# Altium PCB TP4056_2022-02-24.pcbdoc
Units mm, origin at the board's own origin, x right, y up, seen from the top; angles counter-clockwise.
Board outline 58.67 x 48.26 mm, 2 copper layers (Top Layer, Bottom Layer); 20 components, 22 nets, 58 pads, 10 vias.
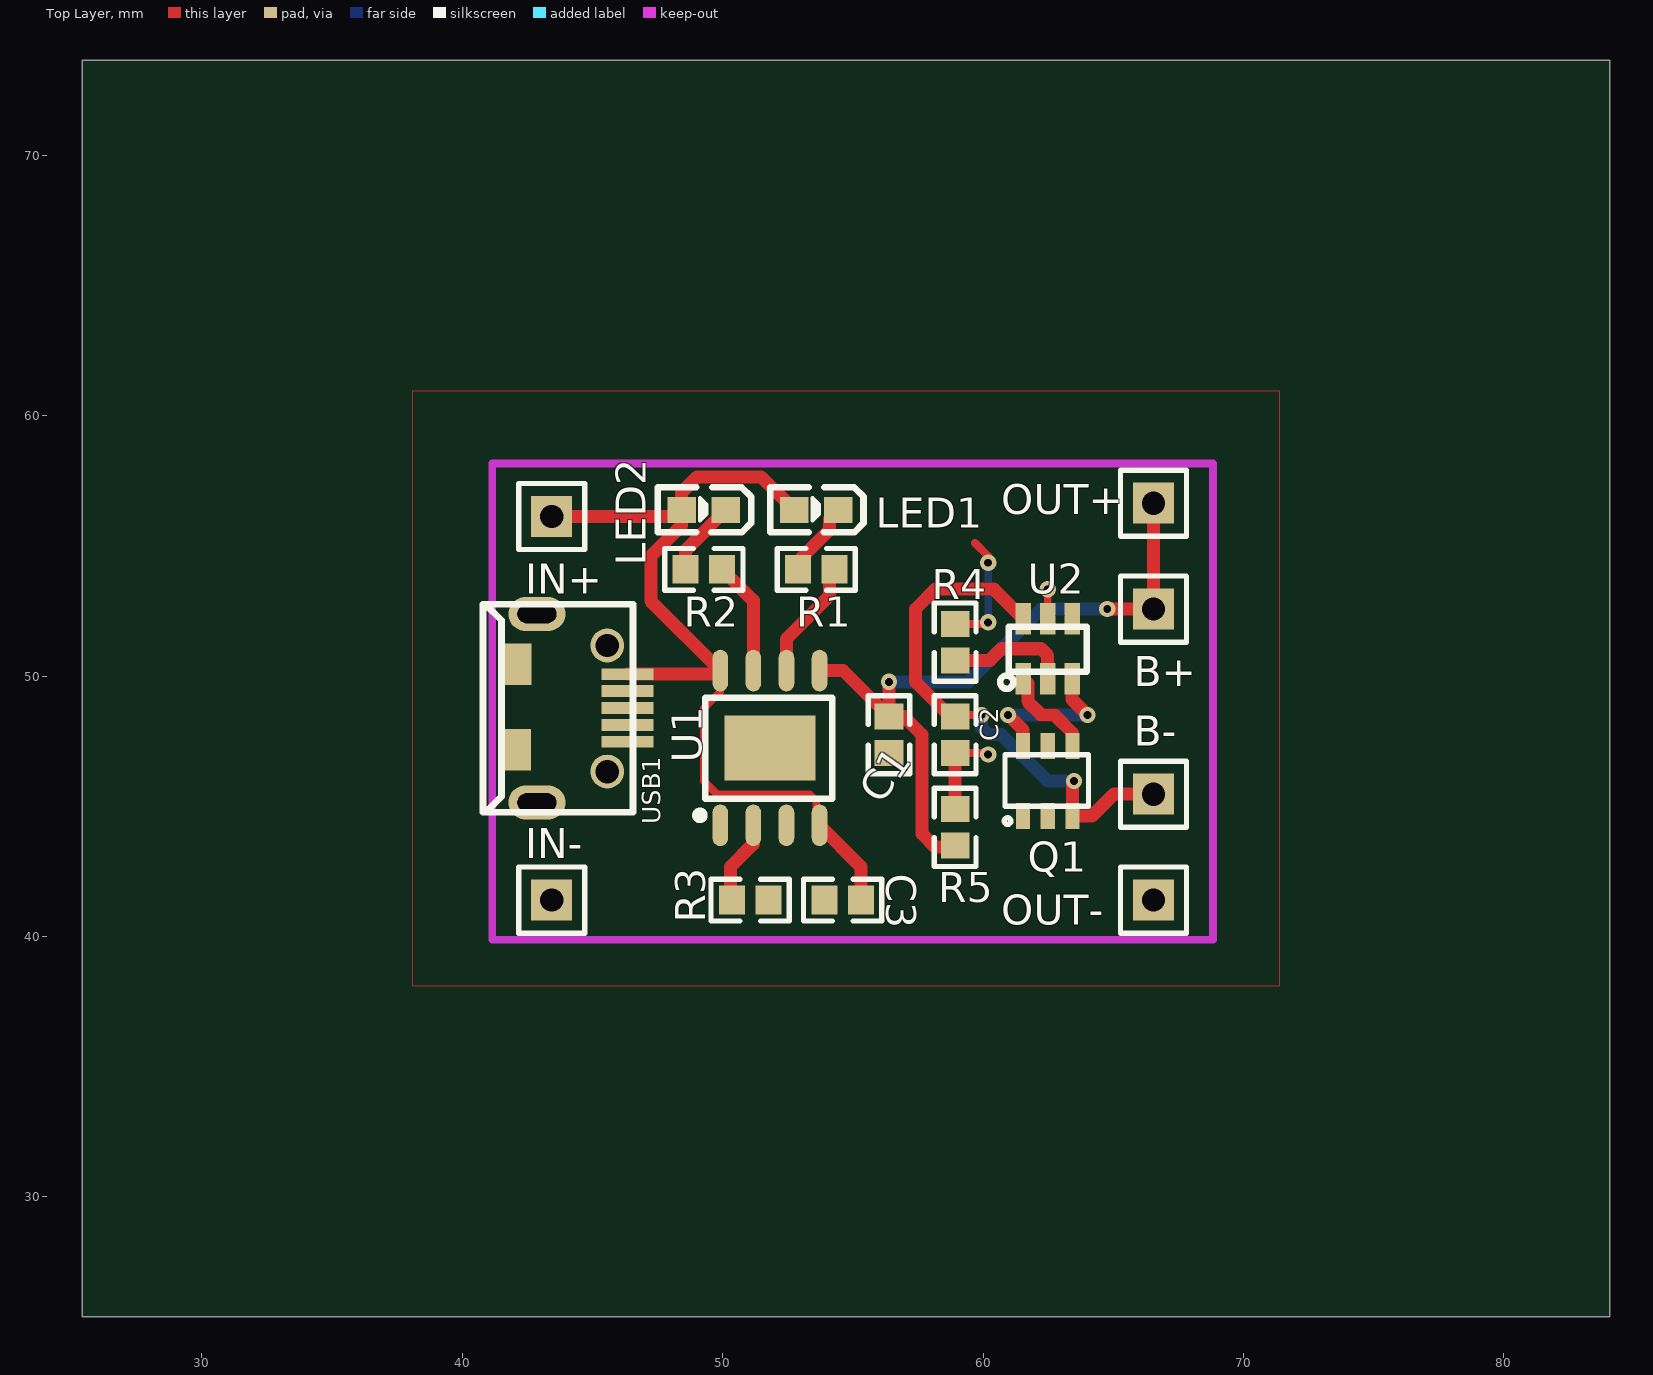
[diagram p0: Top Layer view]
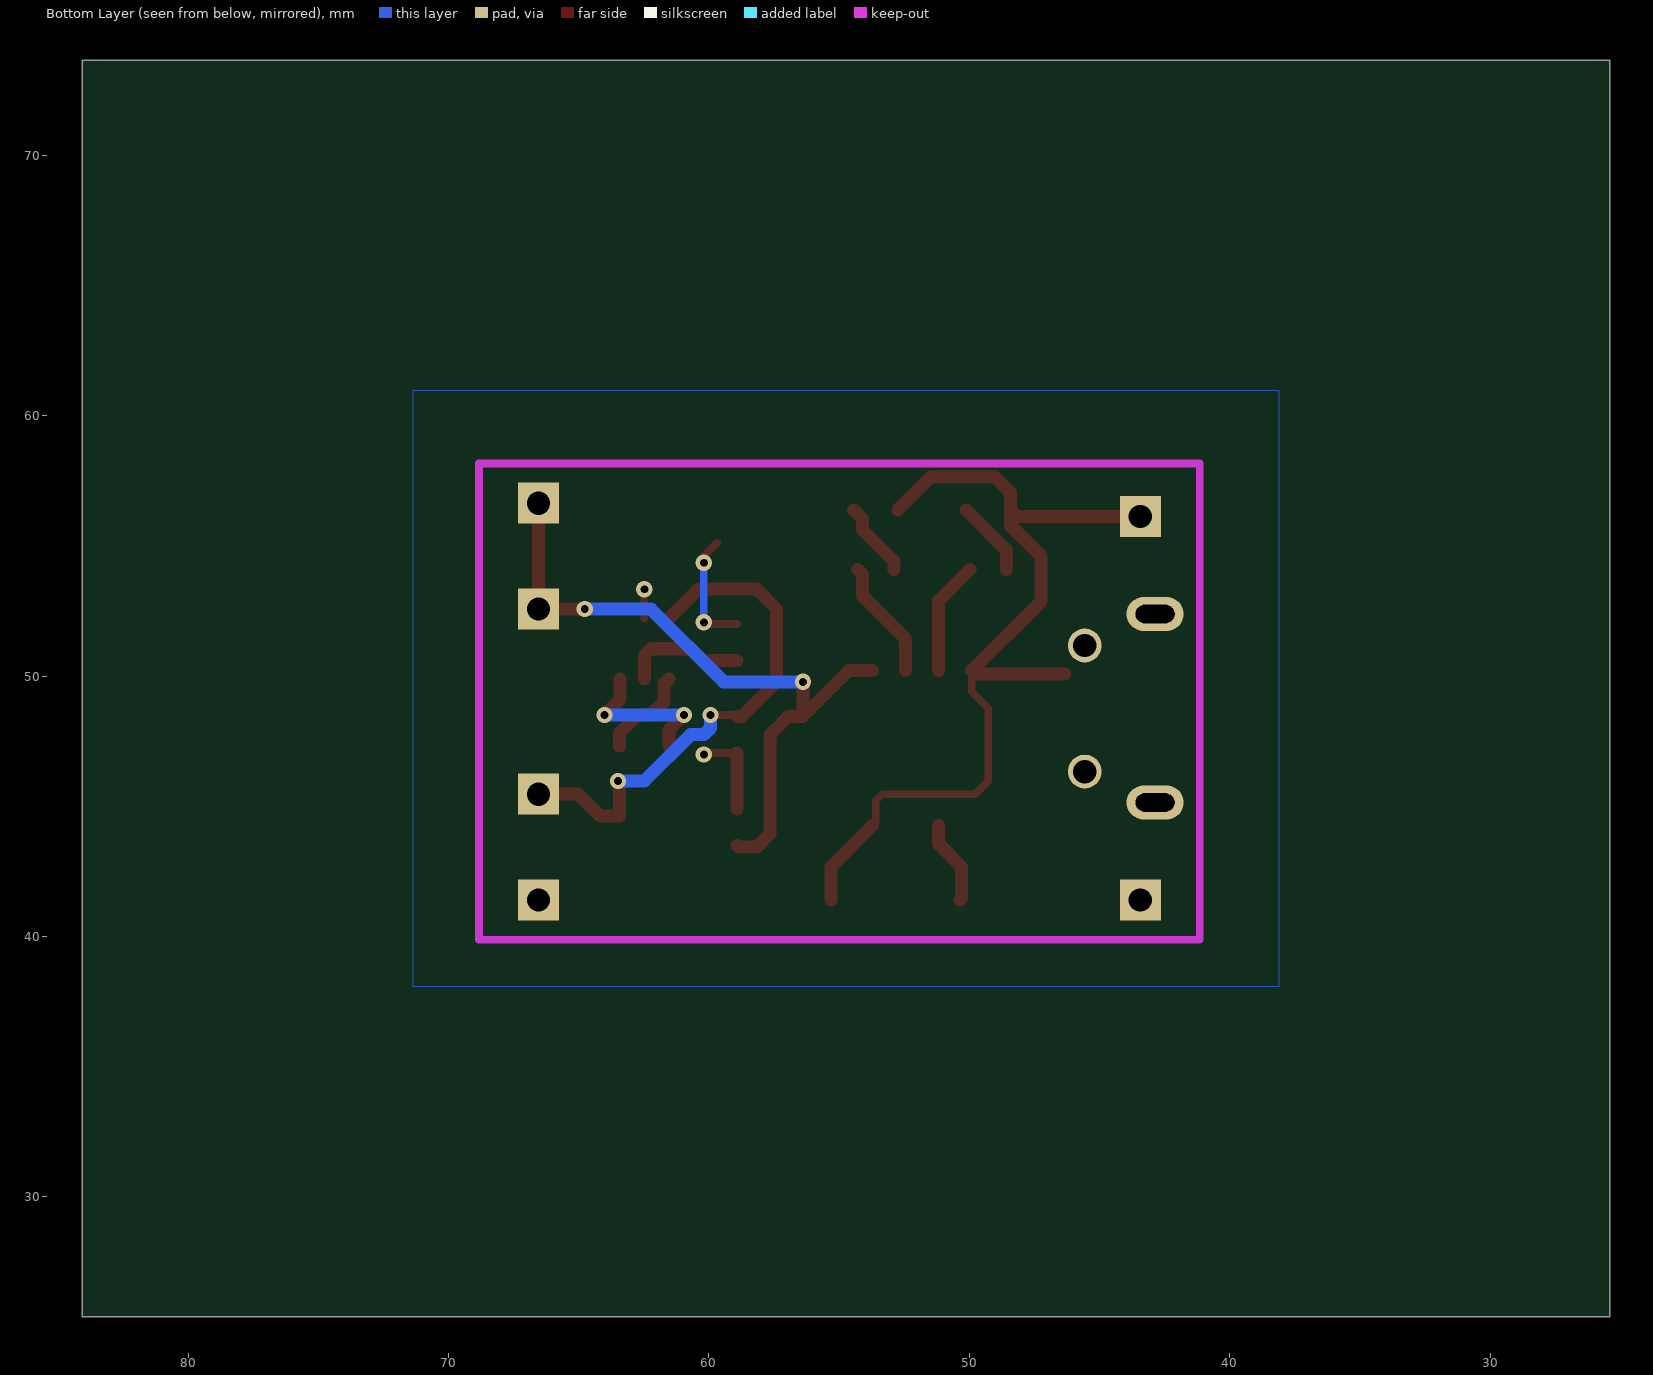
[diagram p1: Bottom Layer view, seen from below]

## Layer stack, top to bottom
Top Layer: signal copper (thickness not stored)
Dielectric: dielectric 0.32, FR-4, Dk 4.8
Bottom Layer: signal copper (thickness not stored)

## Board outline
84.074,25.4 25.4,25.4 25.4,73.66 84.074,73.66

## Components (designator, comment, footprint, x,y, rotation, side; value= is the part's Value field where it differs from the comment)
B+ "Header-Male-2.54_1x1" HDR-1X1/2.54 66.548,52.578 r0 top
B- "Header-Male-2.54_1x1" HDR-1X1/2.54 66.548,45.466 r0 top
C1 "10uF" 0603 56.388,47.752 r90 top
C2 "100nF" 0603 58.928,47.752 r90 top
C3 "100nF" 0603 54.61,41.402 r0 top
IN+ "Header-Male-2.54_1x1" HDR-1X1/2.54 43.434,56.134 r0 top
IN- "Header-Male-2.54_1x1" HDR-1X1/2.54 43.434,41.402 r0 top
LED1 "GREEN" LED-0603 53.594,56.388 r180 top
LED2 "RED" LED-0603 49.276,56.388 r180 top
OUT+ "Header-Male-2.54_1x1" HDR-1X1/2.54 66.548,56.642 r0 top
OUT- "Header-Male-2.54_1x1" HDR-1X1/2.54 66.548,41.402 r0 top
Q1 "FS8205" SOT-23-6 62.483,45.974 r90 top
R1 "1K" 0603 53.594,54.102 r0 top
R2 "1K" 0603 49.276,54.102 r180 top
R3 "1.2KΩ" 0603 51.054,41.402 r0 top
R4 "1K" 0603 58.928,51.308 r270 top
R5 "100Ω" 0603 58.928,44.196 r270 top
U1 "TP4056" SOP-8_EP_150MIL 51.816,47.244 r90 top
U2 "DW01A" SOT-23-6L 62.484,51.054 r0 top
USB1 "MicroUSB" MICRO-USB-1 44.196,48.768 r180 top

## Footprints (in the part's own frame and the unit in brackets; to place one, negate y for a bottom-side part, rotate by r counter-clockwise, add the part's x,y. Pads: shape width x height; smd on the part's side, far side on the other; paste and mask are expansions set on the pad)
0603 [mm]
  rect 1x1.1 smd: 1(-0.7,0) 2(0.7,0)
  silkscreen extent -1.5,-0.8 1.5,0.8
HDR-1X1/2.54 [mil]
  rect 62x62 hole 35: 1(0,0)
  silkscreen extent -50,-50 50,50
LED-0603 [mil]
  rect 43x39 smd: 1(33.5,0) 2(-33.5,0)
  silkscreen extent -72,-34 70,34
MICRO-USB-1 [mm]
  round 1.3 hole 0.9: 0(-1.371,2.431) 0(-1.371,-2.41)
  oval 2.2x1.3 hole 0.7 slot 1.5 at 0 deg: 0(1.329,3.619) 0(1.329,-3.619)
  rect 1.2x1.6 smd: 0(2.14,-1.684) 0(2.156,1.595)
  rect 2x0.45 smd: 1(-2.155,-1.309) 2(-2.155,-0.66) 3(-2.155,-0.01) 4(-2.155,0.639) 5(-2.155,1.289)
  silkscreen extent -2.36,-4 3.4,4
SOP-8_EP_150MIL [mm]
  oval 1.6x0.6 smd: 1(-2.972,1.905) 2(-2.972,0.635) 3(-2.972,-0.635) 4(-2.972,-1.905) 5(2.972,-1.905) 6(2.972,-0.635) 7(2.972,0.635) 8(2.972,1.905)
  rect 2.5x3.5 smd: 9(0,0)
  silkscreen extent -2.74,-2.39 1.93,2.84
SOT-23-6 [mm]
  rect 1x0.55 smd: 1(-1.35,0.95) 2(-1.35,0) 3(-1.35,-0.95) 4(1.35,-0.95) 5(1.35,0) 6(1.35,0.95)
  silkscreen extent -1.67,-1.56 1.01,1.67
SOT-23-6L [mil]
  rect 23.6x47.2 smd: 1(-37,-45.5) 2(0,-45.5) 3(37,-45.5) 4(37,45.5) 5(0,45.5) 6(-37,45.5)
  silkscreen extent -72,-60 59,34

## Via types
v1: diameter 0.62, hole 0.305, Top Layer to Bottom Layer, tented both sides, 10 vias

## Nets (pads, with @x,y where several pads share a name; then routed paths per layer and width w, separated by ;. In a path a pad name is that pad's centre, name@x,y a point inside that pad or via, vN(x,y) a via of type N, cw(c..) or ccw(c..) an arc to the next point about the centre after c; other vN are vias at no path point)
GND: C1.1 C3.1 IN-.1 OUT-.1 Q1.1 R3.2 R4.1 U1.1 U1.3 USB1.5 | length 4.6
  Top Layer w0.3: R4.1 60.136,52.008 v1(60.198,52.07) ; 59.69,55.118 60.198,54.61 v1(60.198,54.356)
  Bottom Layer w0.3: v1(60.198,52.07) v1(60.198,54.356)
LED1_2: LED1.2 R1.1 | length 2.9
  Top Layer w0.5: R1.1 52.894,54.418 54.102,55.626 54.102,56.045 LED1.2
LED2_2: LED2.2 R2.2 | length 2.9
  Top Layer w0.5: R2.2 48.576,54.837 LED2.2
Q1_2: Q1.2
Q1_3: B-.1 C2.2 Q1.3 U2.6 | length 20.6
  Top Layer w0.3: C2.2 58.99,48.514 v1(59.944,48.514)
  Top Layer w0.5: C2.2 58.736,48.452 57.404,49.784 57.404,52.578 58.166,53.34 60.414,53.34 U2.6 ; Q1.3 63.433,45.907 v1(63.5,45.974) ; Q1.3 64.182,44.624 65.024,45.466 B-.1
  Bottom Layer w0.5: v1(59.944,48.514) 59.944,48.006 60.198,47.752 60.706,47.752 62.484,45.974 v1(63.5,45.974)
Q1_4: Q1.4 U2.1 | length 3.7
  Top Layer w0.5: U2.1 61.722,49.721 61.722,49.022 62.23,48.514 62.738,48.514 63.434,47.818 Q1.4@63.434,47.324
Q1_5: Q1.5
Q1_6: Q1.6 U2.3 | length 6.1
  Top Layer w0.5: v1(60.96,48.514) 61.534,47.94 Q1.6@61.534,47.324 ; U2.3 63.424,49.098 v1(64.008,48.514)
  Bottom Layer w0.5: v1(60.96,48.514) v1(64.008,48.514)
S$67: 
S$69: 
U1_2: R3.1 U1.2 | length 3.3
  Top Layer w0.5: R3.1 50.292,41.464 50.292,42.672 51.181,43.561 U1.2
U1_5: B+.1 C1.2 OUT+.1 R5.2 U1.5 | length 27
  Top Layer w0.5: U1.5 54.624,50.216 C1.2 ; v1(56.388,49.784) C1.2 ; R5.2 58.866,43.434 58.166,43.434 57.658,43.942 57.658,47.752 56.958,48.452 C1.2 ; v1(64.77,52.578) B+.1 OUT+.1
  Bottom Layer w0.5: v1(56.388,49.784) 59.436,49.784 62.23,52.578 v1(64.77,52.578)
U1_6: R1.2 U1.6 | length 4.6
  Top Layer w0.5: U1.6 52.451,51.435 54.102,53.086 54.102,53.91 R1.2
U1_7: R2.1 U1.7 | length 4.4
  Top Layer w0.5: R2.1 51.181,52.897 U1.7
U2_2: R4.2 U2.2 | length 4.7
  Top Layer w0.5: R4.2 60.26,50.608 60.706,51.054 62.23,51.054 62.484,50.8 U2.2
U2_4: U2.4
U2_5: C2.1 R5.1 U2.5 | length 4.6
  Top Layer w0.3: C2.1 60.136,47.052 v1(60.198,46.99) ; U2.5 v1(62.484,53.34)
  Top Layer w0.5: R5.1 C2.1
USB1_0: USB1.0
USB1_1: C3.2 IN+.1 LED1.1 LED2.1 U1.4 U1.8 USB1.1 | length 35.9
  Top Layer w0.3: U1.8 49.911,49.403 49.276,48.768 49.276,45.974 49.784,45.466 53.34,45.466 53.594,45.212 53.594,44.399 U1.4
  Top Layer w0.5: IN+.1 48.171,56.134 LED2.1 ; USB1.1@46.352,50.078 49.774,50.078 U1.8 47.244,52.883 47.244,53.086 47.244,54.61 48.425,55.791 LED2.1 ; LED1.1 51.473,57.658 49.022,57.658 48.425,57.061 LED2.1 ; U1.4 55.31,42.683 C3.2
USB1_2: USB1.2
USB1_3: USB1.3
USB1_4: USB1.4
pads on no net: U1.9

## Polygon pours and split planes (outlines as drawn)
U2_5 on Bottom Layer (solid): 38.1,60.96 71.374,60.96 71.374,38.1 38.1,38.1
GND on Top Layer (solid): 38.1,60.96 71.374,60.96 71.374,38.1 38.1,38.1

## Silkscreen, mask and mechanical layers (free items; w line width, h text height)
Document:
  lines w0.003: 54.737,49.53 54.737,49.53